# Altium PCB SidePanel.PcbDoc
Units mil, origin at the board's own origin, x right, y up, seen from the top; angles counter-clockwise.
Board outline 8000 x 1750 mil, 2 copper layers (Top Layer, Bottom Layer); 20 components, 0 nets, 0 pads, 0 vias.
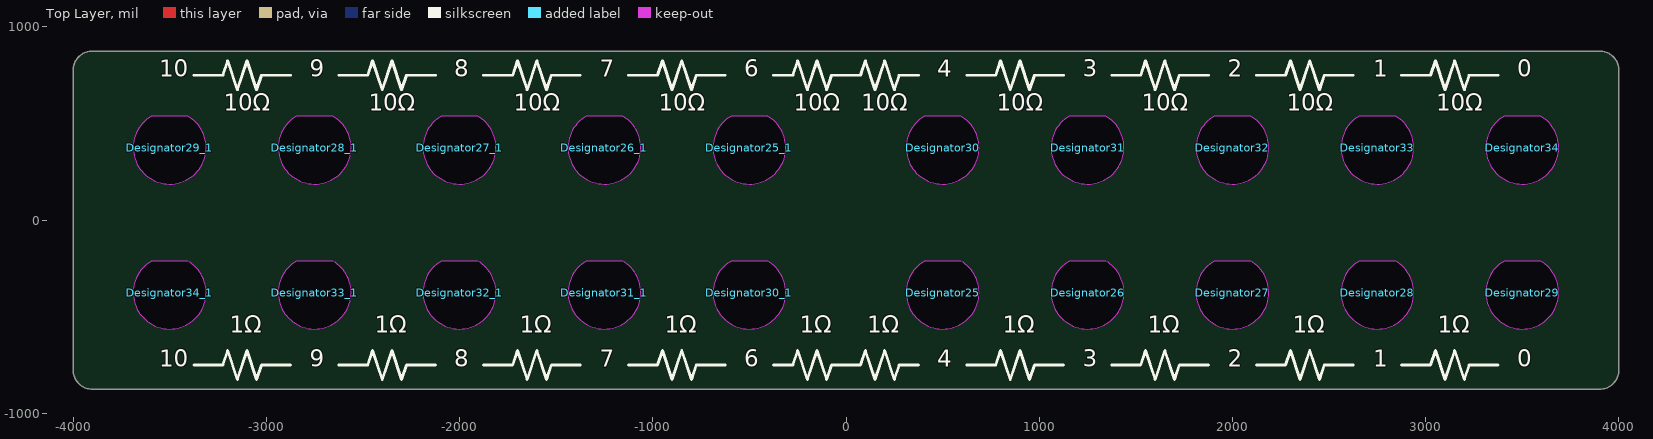
[diagram p0: Top Layer view]
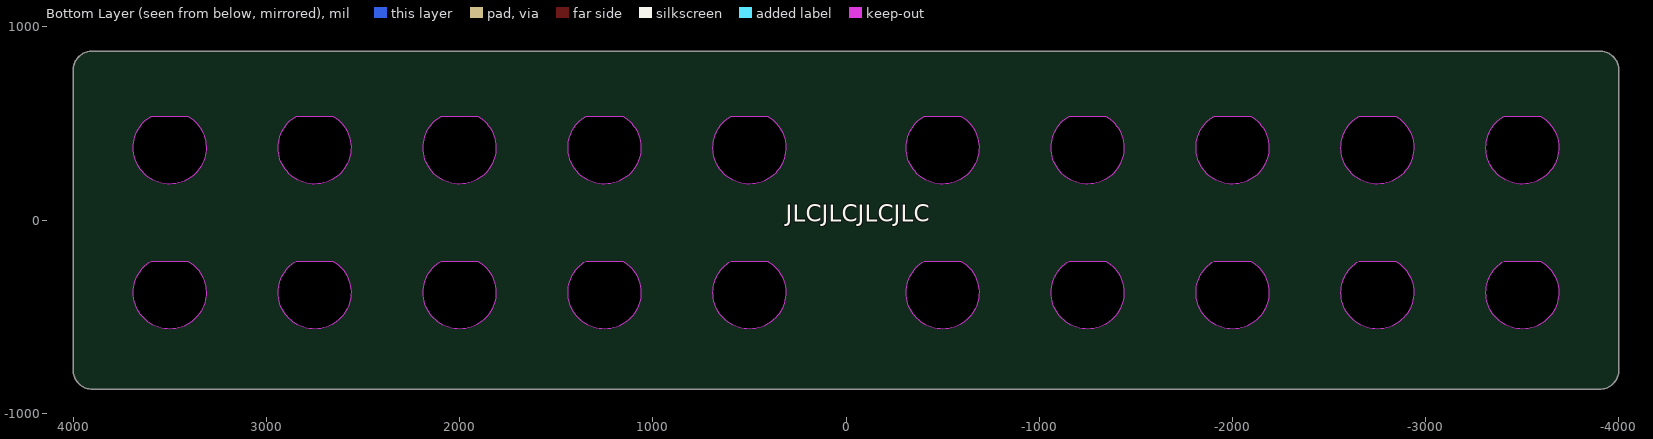
[diagram p1: Bottom Layer view, seen from below]

## Layer stack, top to bottom
Top Solder: solder mask 0.4, Solder Resist, Dk 3.5
Top Layer: signal copper 1.4
Dielectric 1: dielectric 12.6, FR-4, Dk 4.8
Bottom Layer: signal copper 1.4
Bottom Solder: solder mask 0.4, Solder Resist, Dk 3.5

## Board outline
-4000,-775 -4000,775 cw(c-3900,775) -3900,875 3900,875 cw(c3900,775) 4000,775 4000,-775 cw(c3900,-775) 3900,-875 -3900,-875 cw(c-3900,-775)

## Design rules (kind name [scope] priority, off if disabled: settings)
Clearance [All] p1: gap=10 ignorepadtopadclearanceinfootprint=FALSE except(0: Arc-Hole Track-Hole SMDPad-Hole THPad-Hole Via-Hole Fill-Hole Poly-Hole Region-Hole Text-Hole)
PolygonConnect [All] p1: connectstyle=Relief reliefconductorwidth=10 reliefentries=4 polygonreliefangle="90 Angle" airgapwidth=10
RoutingVias [All] p1: holewidth=28 width=50 viastyle="Through Hole" minholewidth=28 minwidth=50 maxholewidth=28 maxwidth=50
SolderMaskExpansion [All] p1: expansion=4 istentingtop=FALSE
Width [All] p1: maxlimit=10 minlimit=10 preferedwidth=10
30 further rules are at their usual default settings.

## Components (designator, comment, footprint, x,y, rotation, side; value= is the part's Value field where it differs from the comment)
Designator25 "Comment" BINDING 500,-375 r0 top
Designator25_1 "Comment" BINDING -500,375 r0 top
Designator26 "Comment" BINDING 1250,-375 r0 top
Designator26_1 "Comment" BINDING -1250,375 r0 top
Designator27 "Comment" BINDING 2000,-375 r0 top
Designator27_1 "Comment" BINDING -2000,375 r0 top
Designator28 "Comment" BINDING 2750,-375 r0 top
Designator28_1 "Comment" BINDING -2750,375 r0 top
Designator29 "Comment" BINDING 3500,-375 r0 top
Designator29_1 "Comment" BINDING -3500,375 r0 top
Designator30 "Comment" BINDING 500,375 r0 top
Designator30_1 "Comment" BINDING -500,-375 r0 top
Designator31 "Comment" BINDING 1250,375 r0 top
Designator31_1 "Comment" BINDING -1250,-375 r0 top
Designator32 "Comment" BINDING 2000,375 r0 top
Designator32_1 "Comment" BINDING -2000,-375 r0 top
Designator33 "Comment" BINDING 2750,375 r0 top
Designator33_1 "Comment" BINDING -2750,-375 r0 top
Designator34 "Comment" BINDING 3500,375 r0 top
Designator34_1 "Comment" BINDING -3500,-375 r0 top

## Footprints (in the part's own frame and the unit in brackets; to place one, negate y for a bottom-side part, rotate by r counter-clockwise, add the part's x,y. Pads: shape width x height; smd on the part's side, far side on the other; paste and mask are expansions set on the pad)
BINDING [mil]
  Keep-Out Layer board cut-out: -94.05,163.38 -157.38,103.77 -187.22,22.07 -177.2,-64.32 -129.46,-137.03 -54.17,-180.56 32.66,-185.67 112.53,-151.24 168.45,-84.63 188.51,0 188.52,0 177.12,64.55 144.31,121.3 94.05,163.38 94.05,163.38 93.92,163.43 93.79,163.45 93.79,163.45 -93.79,163.45 -93.92,163.43 -94.05,163.38
  body extent -220,-220 220,220, height 810

## Nets (pads, with @x,y where several pads share a name; then routed paths per layer and width w, separated by ;. In a path a pad name is that pad's centre, name@x,y a point inside that pad or via, vN(x,y) a via of type N, cw(c..) or ccw(c..) an arc to the next point about the centre after c; other vN are vias at no path point)

## Silkscreen, mask and mechanical layers (free items; w line width, h text height)
Top Overlay:
  lines w15: -3375,-750 -3225,-750 -3200,-675 -3150,-825 -3100,-675 -3050,-825 -3025,-750 -2875,-750 ; -3375,750 -3225,750 -3200,825 -3150,675 -3100,825 -3050,675 -3025,750 -2875,750 ; -2625,-750 -2475,-750 -2450,-675 -2400,-825 -2350,-675 -2300,-825 -2275,-750 -2125,-750 ; -2625,750 -2475,750 -2450,825 -2400,675 -2350,825 -2300,675 -2275,750 -2125,750 ; -1875,-750 -1725,-750 -1700,-675 -1650,-825 -1600,-675 -1550,-825 -1525,-750 -1375,-750 ; -1875,750 -1725,750 -1700,825 -1650,675 -1600,825 -1550,675 -1525,750 -1375,750 ; -1125,-750 -975,-750 -950,-675 -900,-825 -850,-675 -800,-825 -775,-750 -625,-750 ; -1125,750 -975,750 -950,825 -900,675 -850,825 -800,675 -775,750 -625,750 ; -375,-750 -275,-750 -250,-675 -200,-825 -150,-675 -100,-825 -75,-750 75,-750 100,-675 150,-825 200,-675 250,-825 275,-750 375,-750 ; -375,750 -275,750 -250,825 -200,675 -150,825 -100,675 -75,750 75,750 100,825 150,675 200,825 250,675 275,750 375,750 ; 625,-750 775,-750 800,-675 850,-825 900,-675 950,-825 975,-750 1125,-750 ; 625,750 775,750 800,825 850,675 900,825 950,675 975,750 1125,750 ; 1375,-750 1525,-750 1550,-675 1600,-825 1650,-675 1700,-825 1725,-750 1875,-750 ; 1375,750 1525,750 1550,825 1600,675 1650,825 1700,675 1725,750 1875,750 ; 2125,-750 2275,-750 2300,-675 2350,-825 2400,-675 2450,-825 2475,-750 2625,-750 ; 2125,750 2275,750 2300,825 2350,675 2400,825 2450,675 2475,750 2625,750 ; 2875,-750 3025,-750 3050,-675 3100,-825 3150,-675 3200,-825 3225,-750 3375,-750 ; 2875,750 3025,750 3050,825 3100,675 3150,825 3200,675 3225,750 3375,750
  text "10" at -3554.9,711.21 h150
  text "9" at -2775.54,711.21 h150
  text "8" at -2026.16,711.21 h150
  text "7" at -1275.33,711.41 h150
  text "6" at -525.47,711.21 h150
  text "4" at 472.1,711.21 h150
  text "3" at 1225.71,711.21 h150
  text "2" at 1975.71,710.65 h150
  text "1" at 2727.44,710.93 h150
  text "0" at 3473.14,711.21 h150
  text "10Ω" at -3219.94,536.21 h150
  text "10Ω" at -2469.94,536.21 h150
  text "10Ω" at -1719.94,536.21 h150
  text "10Ω" at -969.94,536.21 h150
  text "10Ω" at -269.94,536.21 h150
  text "10Ω" at 80.06,536.21 h150
  text "10Ω" at 780.06,536.21 h150
  text "10Ω" at 1530.06,536.21 h150
  text "10Ω" at 2280.06,536.21 h150
  text "10Ω" at 3055.06,536.21 h150
  text "1Ω" at -3188.78,-614.35 h150
  text "1Ω" at -2438.78,-614.35 h150
  text "1Ω" at -1688.78,-614.35 h150
  text "1Ω" at -938.78,-614.35 h150
  text "1Ω" at -238.78,-614.35 h150
  text "1Ω" at 111.22,-614.35 h150
  text "1Ω" at 811.22,-614.35 h150
  text "1Ω" at 1561.22,-614.35 h150
  text "1Ω" at 2311.22,-614.35 h150
  text "1Ω" at 3061.22,-614.35 h150
  text "10" at -3554.9,-788.79 h150
  text "9" at -2775.54,-788.79 h150
  text "8" at -2026.16,-788.79 h150
  text "7" at -1275.33,-788.59 h150
  text "6" at -525.47,-788.79 h150
  text "4" at 472.1,-788.79 h150
  text "3" at 1225.71,-788.79 h150
  text "2" at 1975.71,-789.35 h150
  text "1" at 2727.44,-789.07 h150
  text "0" at 3473.14,-788.79 h150
Bottom Overlay:
  text "JLCJLCJLCJLC" at 310.7,-38.73 h150
Board Shape:
  the board outline again, w2